# Altium PCB vending_machine_V1.0.PcbDoc
Units mil, origin at the board's own origin, x right, y up, seen from the top; angles counter-clockwise.
Board outline 2243.78 x 2899.78 mil, 2 copper layers (Top Layer, Bottom Layer); 12 components, 27 nets, 89 pads, 14 vias.
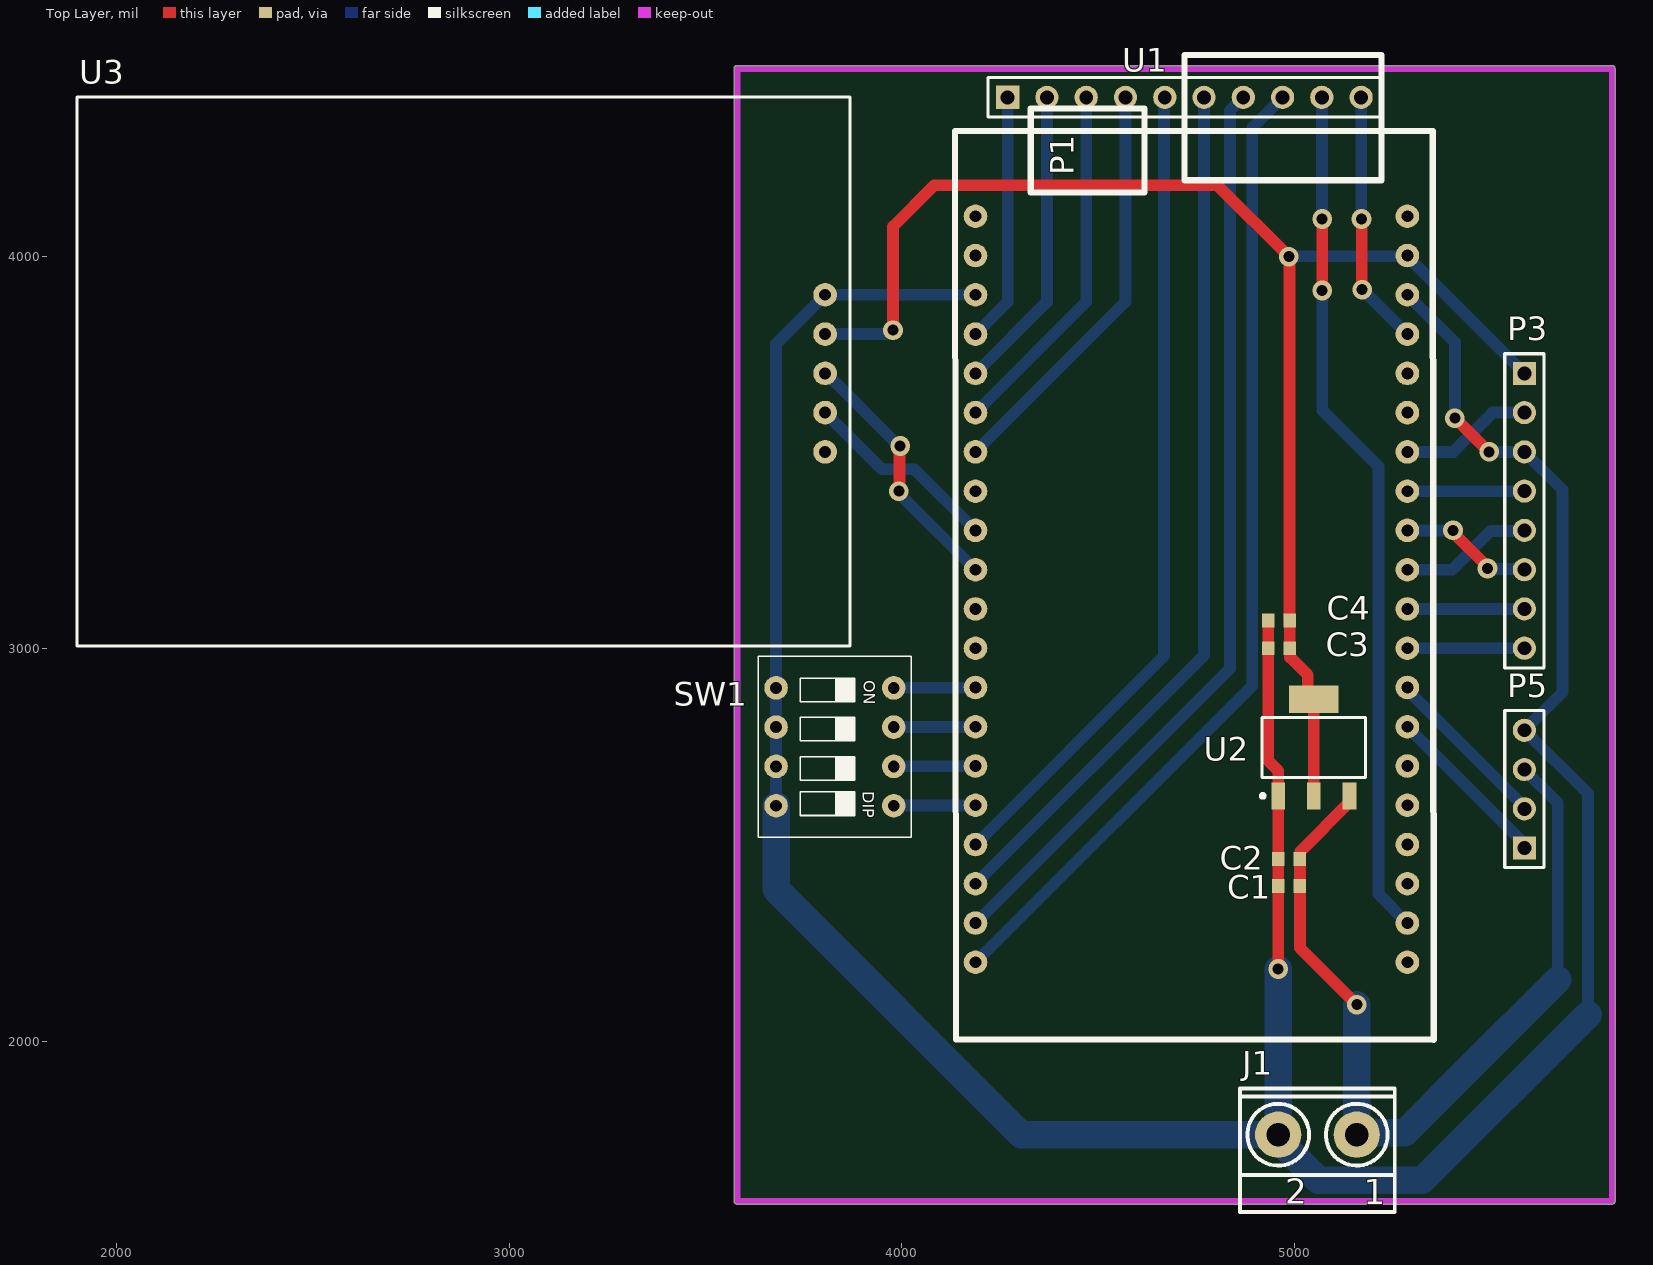
[diagram p0: Top Layer view]
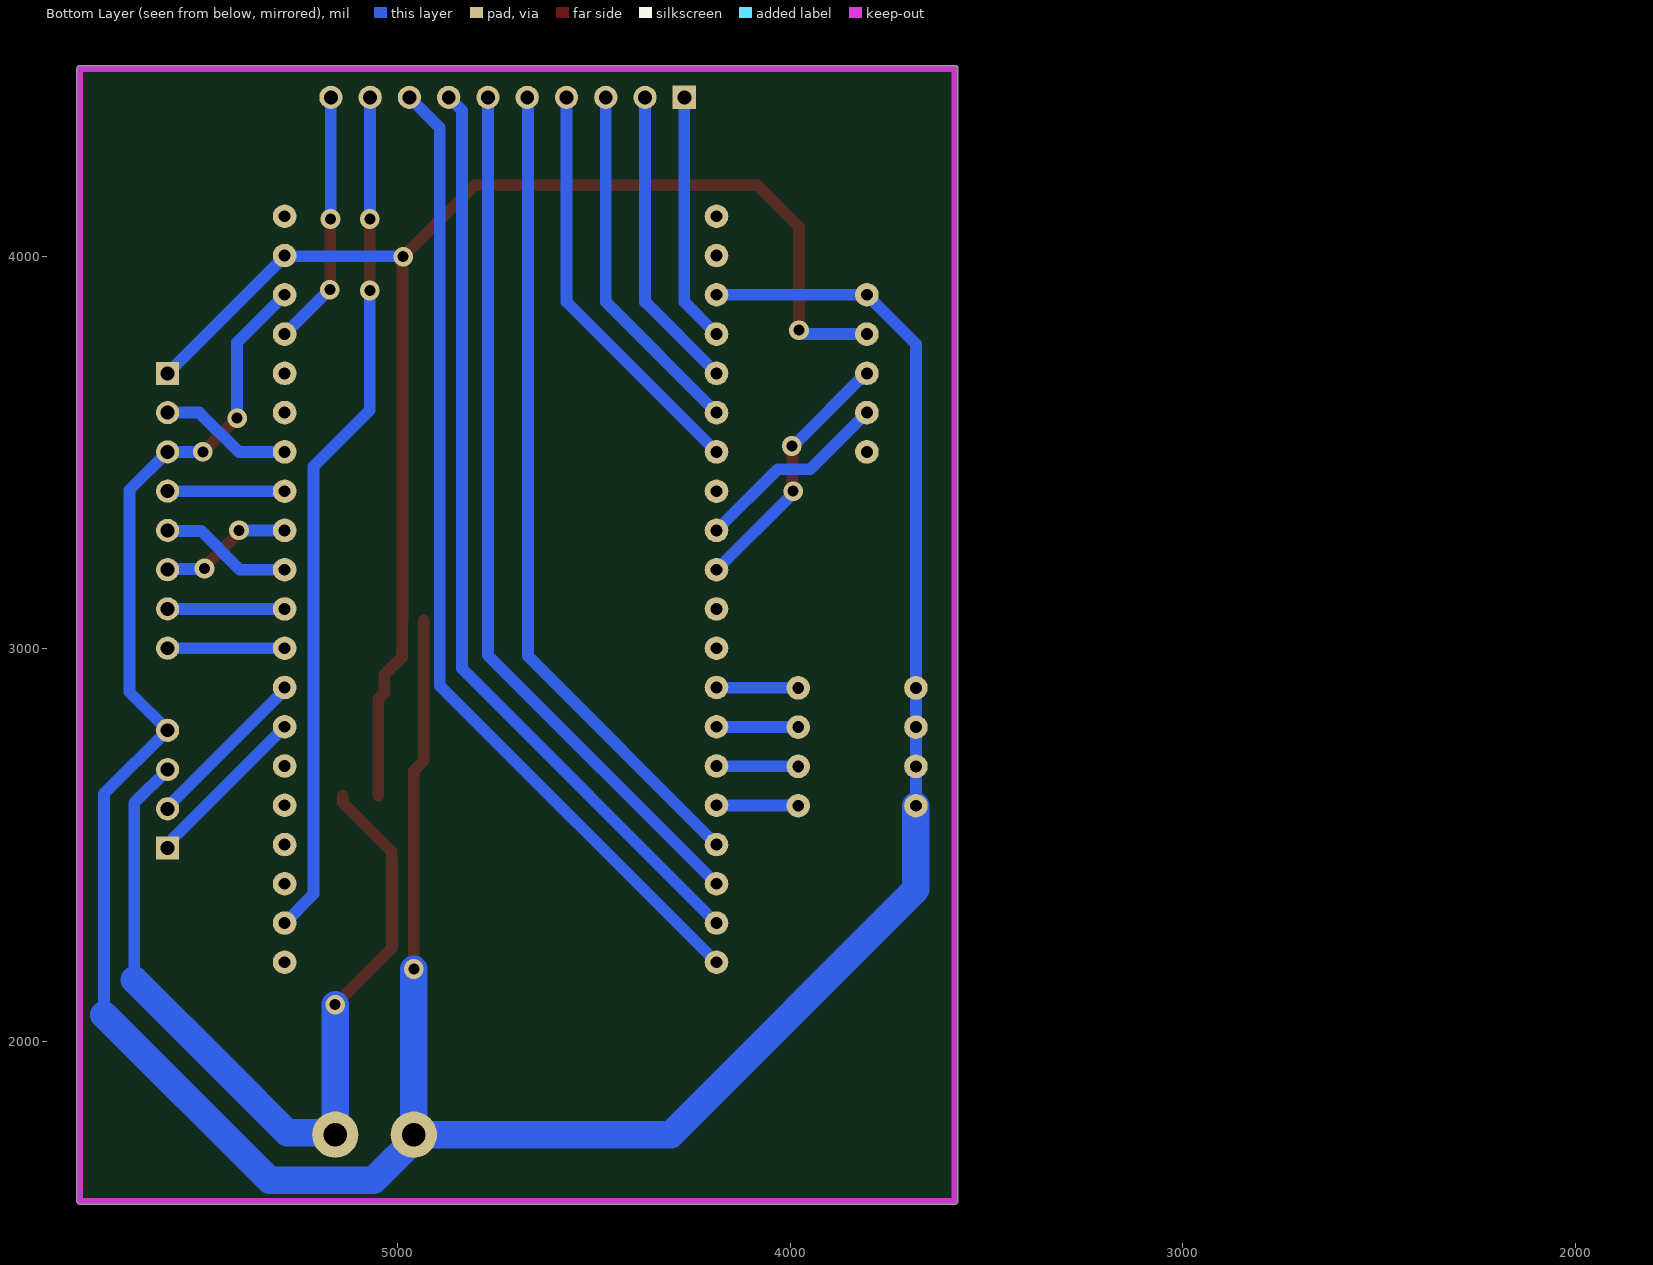
[diagram p1: Bottom Layer view, seen from below]

## Layer stack, top to bottom
Top Solder: solder mask 0.4, Solder Resist, Dk 3.5
Top Layer: signal copper 1.4
Dielectric 1: dielectric 12.6, FR-4, Dk 4.8
Bottom Layer: signal copper 1.4
Bottom Solder: solder mask 0.4, Solder Resist, Dk 3.5

## Board outline
3573.11,1594 3573.11,4478 cw(c3581,4478) 3581,4485.89 5809,4485.89 cw(c5809,4478) 5816.89,4478 5816.89,1594 cw(c5809,1594) 5809,1586.11 3581,1586.11 cw(c3581,1594)

## Design rules (kind name [scope] priority, off if disabled: settings)
Clearance [All] p1: gap=10 ignorepadtopadclearanceinfootprint=FALSE except(0: Arc-Hole Track-Hole SMDPad-Hole THPad-Hole Via-Hole Fill-Hole Poly-Hole Region-Hole Text-Hole)
ComponentClearance [All] p1 off: gap=10 collisioncheckmode=3 verticalgap=10 showdistances=FALSE
PolygonConnect [All] p1: connectstyle=Relief reliefconductorwidth=10 reliefentries=4 polygonreliefangle="90 Angle" airgapwidth=10
RoutingVias [All] p1: holewidth=28 width=50 viastyle="Through Hole" minholewidth=28 minwidth=50 maxholewidth=28 maxwidth=50
SolderMaskExpansion [All] p1: expansion=4 istentingtop=FALSE
Width [All] p1: maxlimit=70 minlimit=10 preferedwidth=30 toplayer_maxwidth=60 minimp=50.000000 maximp=50.000000 favimp=50.000000
29 further rules are at their usual default settings.

## Components (designator, comment, footprint, x,y, rotation, side; value= is the part's Value field where it differs from the comment)
C1 "Cap Semi" 1608[0603] 4986.56,2396 r0 top value=2.2uF
C2 "Cap Semi" 1608[0603] 4986.56,2465 r0 top value=0.1uF
C3 "Cap Semi" 1608[0603] 4961,3002 r0 top value=2.2uF
C4 "Cap Semi" 1608[0603] 4961,3073 r0 top value=0.1uF
J1 "Terminal_Block" "terminal block" 4978.5,2015.6 r270 top
P1 "Motor" HDR1X10 4270,4405 r0 top
P3 "RFID_SPI" HDR1X8 5586,3702 r270 top
P5 "Header 4" HDR1X4 5586,2493 r90 top
SW1 "DIP_4_Switch" Switch_4 3680,2901 r270 top
U1 "STM32F103" STM32F103 4188,2202 r0 top
U2 "LM1117" "LM1117 - duplicate" 5049.55,2749 r90 top
U3 "ESP12_F_Module" ESP12_F_Holtek 3867.99,3007.91 r90 top

## Footprints (in the part's own frame and the unit in brackets; to place one, negate y for a bottom-side part, rotate by r counter-clockwise, add the part's x,y. Pads: shape width x height; smd on the part's side, far side on the other; paste and mask are expansions set on the pad)
1608[0603] [mm] "Chip Capacitor, Body 1.6x0.8mm, IPC High Density"
  rect 0.8x0.9 smd: 1(-0.7,0) 2(0.7,0)
  body extent -0.87,-0.48 0.87,0.48, height 1.3
ESP12_F_Holtek [mil] "Holtek_Wi-Fi_module"
  round 60 hole 30: 1(494.09,62.99) 2(594.09,62.99) 3(694.09,62.99) 4(794.09,62.99) 5(894.09,62.99)
  silkscreen extent 0,0 1398,1969
HDR1X4 [mm] "Connector; Header; 4 Position"
  rect 1.5x1.5 hole 0.9: 1(0,0)
  round 1.5 hole 0.9: 2(2.54,0) 3(5.08,0) 4(7.62,0)
  silkscreen extent -1.27,-1.27 8.89,1.27
HDR1X8 [mm] "Connector; Header; 8 Position"
  rect 1.5x1.5 hole 0.9: 1(0,0)
  round 1.5 hole 0.9: 2(2.54,0) 3(5.08,0) 4(7.62,0) 5(10.16,0) 6(12.7,0) 7(15.24,0) 8(17.78,0)
  silkscreen extent -1.27,-1.27 19.05,1.27
HDR1X10 [mm] "Connector; Header; 10 Position"
  rect 1.5x1.5 hole 0.9: 1(0,0)
  round 1.5 hole 0.9: 2(2.54,0) 3(5.08,0) 4(7.62,0) 5(10.16,0) 6(12.7,0) 7(15.24,0) 8(17.78,0) 9(20.32,0) 10(22.86,0)
  silkscreen extent -1.27,-1.27 24.13,1.27
"LM1117 - duplicate" [mm] "SOT223, 4-Leads, Body 6.50x7.00mm (avg), Pitch 2.30mm, IPC Medium Density"
  rect 1.75x0.9 smd: 1(-3.125,2.3) 2(-3.125,0) 3(-3.125,-2.3)
  rect 1.75x3.2 smd: 4(3.125,0)
  silkscreen extent -3.25,-3.35 1.95,3.42, body extent -1.85,-3.35 1.85,3.35, height 1.8
STM32F103 [mil] "STM32F103"
  round 60 hole 30: 1(0,1900) 2(0,1800) 3(0,1700) 4(0,1600) 5(0,1500) 6(0,1400) 7(0,1300) 8(0,1200) 9(0,1100) 10(0,1000) 11(0,900) 12(0,800) 13(0,700) 14(0,600) 15(0,500) 16(0,400) 17(0,300) 18(0,200) 19(0,100) 20(0,0) 21(1100,1900) 22(1100,1800) 23(1100,1700) 24(1100,1600) 25(1100,1500) 26(1100,1400) 27(1100,1300) 28(1100,1200) 29(1100,1100) 30(1100,1000) 31(1100,900) 32(1100,800) 33(1100,700) 34(1100,600) 35(1100,500) 36(1100,400) 37(1100,300) 38(1100,200) 39(1100,100) 40(1100,0)
  silkscreen extent -52,-197 1167,2311
Switch_4 [mil] "DIP_4_Switch"
  round 60 hole 30: 1(0,300) 2(100,300) 3(200,300) 4(300,300) 5(0,0) 6(100,0) 7(200,0) 8(300,0)
  silkscreen extent -81,-45 381,345
"terminal block" [mm]
  round 3 hole 1.5 paste+0 mask+0.051: 1(6.416,4.585) 2(6.416,-0.495)
  silkscreen extent 3.42,-2.96 11.42,7.04

## Part data
C1 C2 C3 C4: "Capacitor (Semiconductor SIM Model)", LatestRevisionDate=29-May-2009, LatestRevisionNote="IPC-7351 Footprint Added.", PackageDescription="Chip Capacitor", PackageReference=C1206, Published=8-Jun-2000, Publisher="Altium Limited"
J1: library part "Terminal Block"
P1: library part "Header 10", "Header, 10-Pin", LatestRevisionDate=17-Jul-2002, LatestRevisionNote="Re-released for DXP Platform.", Publisher="Altium Limited"
P3: library part "Header 8", "Header, 8-Pin", LatestRevisionDate=17-Jul-2002, LatestRevisionNote="Re-released for DXP Platform.", Publisher="Altium Limited"
P5: "Header, 4-Pin", LatestRevisionDate=17-Jul-2002, LatestRevisionNote="Re-released for DXP Platform.", Publisher="Altium Limited"
SW1: library part Switch_4
U3: library part ESP12_F_Holtek

## Via types
v1: diameter 50, hole 28, Top Layer to Bottom Layer, 14 vias

## Nets (pads, with @x,y where several pads share a name; then routed paths per layer and width w, separated by ;. In a path a pad name is that pad's centre, name@x,y a point inside that pad or via, vN(x,y) a via of type N, cw(c..) or ccw(c..) an arc to the next point about the centre after c; other vN are vias at no path point)
3.3V: C3.2 C4.2 P3.1 U1.22 U2.2 U2.4 U3.4 | length 3691.6
  Top Layer w30: v1(3978,3812) 3978,4076 4083,4181 4804,4181 4987.81,3997.19 4987.81,3073.75 C4.2 C3.2 4989.31,3001.25 4989.31,2978.69 5034.09,2933.91 5034.09,2887.49 U2.4 U2.2
  Bottom Layer w30: U3.4 3962.59,3802 3972.59,3812 v1(3978,3812) ; v1(4986,3999) 4987.5,4000.5 5285.5,4000.5 U1.22@5286,4000 ; U1.22 5288,4000 P3.1
5V: C1.2 C2.2 J1.1 P5.3 U2.3 | length 2221
  Top Layer w30: U2.3 5140.1,2609.24 5014.87,2484 5014.87,2465.75 C2.2 C1.2 5014.12,2239.29 5159,2094.41 v1(5159,2094)
  Bottom Layer w30: P5.3 5671,2608 5671,2158
  Bottom Layer w70: v1(5159,2094) J1.1 5164.21,1768.21 5281.21,1768.21 5437,1924 5671,2158
GND: C1.1 C2.1 C3.1 C4.1 J1.2 P3.3 P5.4 SW1.5 SW1.6 SW1.7 SW1.8 U1.3 U1.23 U2.1 U3.5 | length 7989.8
  Top Layer w30: C4.1 4933.44,2715.56 4959,2690 U2.1 C2.1 C1.1 v1(4959,2185) ; v1(5409,3588) 5409.5,3588 5495.5,3502 v1(5496,3502)
  Bottom Layer w30: SW1.8 SW1.7 SW1.6 SW1.5 3680,3777 U3.5 U1.3 ; U1.23 5409,3781 v1(5409,3588) ; v1(5496,3502) P3.3 5683,3405 5683,2890 P5.4 5748,2631 5748,2069
  Bottom Layer w70: SW1.8 3680,2388 4305,1763 J1.2 v1(4959,2185) ; J1.2@4945.5,1763 5061.5,1647 5326,1647 5748,2069
Motor_0_PB12: P1.1 U1.4 | length 637
  Bottom Layer w30: U1.4 4270,3884 P1.1
Motor_1_PB13: P1.2 U1.5 | length 777.7
  Bottom Layer w30: U1.5 4370,3884 P1.2@4370,4404.31
Motor_2_PB14: P1.3 U1.6 | length 917.5
  Bottom Layer w30: U1.6 4470,3884 P1.3@4470,4402.7
Motor_3_PB15: P1.4 U1.7 | length 1057.7
  Bottom Layer w30: U1.7 4570,3884 P1.4@4570,4401.47
Motor_4_PB6: P1.5 U1.17 | length 2098.4
  Bottom Layer w30: U1.17 4668,2982 P1.5@4668,4401.6
Motor_5_PB7: P1.6 U1.18 | length 2244.1
  Bottom Layer w30: U1.18 4770,2984 P1.6
Motor_6_PB8: P1.7 U1.19 | length 2385.5
  Bottom Layer w30: U1.19 4836,2950 4836,4371 P1.7
Motor_7_PB9: P1.8 U1.20 | length 2526.9
  Bottom Layer w30: U1.20 4893,2907 4893,4328 P1.8
Motor_8_PC13: P1.9 U1.39 | length 2193.3
  Top Layer w30: v1(5071,3913) v1(5071,4095)
  Bottom Layer w30: P1.9 5070.5,4404.5 5070.5,4095.5 v1(5071,4095) ; v1(5071,3913) 5071,3608.04 5214.41,3464.63 5214.41,2375.59 U1.39
Motor_9_PB11: P1.10 U1.24 | length 653
  Top Layer w30: v1(5171,4095) 5171.86,4094.14 5171.86,3916.2 v1(5172.73,3915.34)
  Bottom Layer w30: P1.10 5170.5,4404.5 5170.5,4095.5 v1(5171,4095) ; v1(5172.73,3915.34) 5173.69,3915.34 5287.03,3802 U1.24
SPI_MISO_PA6: P3.5 U1.30 | length 339.4
  Bottom Layer w30: U1.30 5402,3202 5500.76,3300.76 5584.76,3300.76 P3.5
SPI_MOSI_PA7: P3.6 U1.29 | length 344.7
  Top Layer w30: v1(5404,3302) 5404,3297.5 5492,3209.5 v1(5492,3205)
  Bottom Layer w30: U1.29 v1(5404,3302) ; v1(5492,3205) 5493.5,3203.5 5584.5,3203.5 P3.6
SPI_RST_PB1: P3.2 U1.27 | length 339.4
  Bottom Layer w30: U1.27 5405,3502 5505,3602 P3.2
SPI_SCK_PA5: P3.7 U1.31 | length 298
  Bottom Layer w30: U1.31 P3.7
SPI_SDA_PA4: P3.8 U1.32 | length 299
  Bottom Layer w30: U1.32@5288,3003 U1.32 P3.8
SPI_SS_PB0: P3.4 U1.28 | length 298
  Bottom Layer w30: U1.28 P3.4
Switch_0_PA15: SW1.1 U1.13 | length 208.4
  Bottom Layer w30: SW1.1 3980.5,2901.5 4187.5,2901.5 U1.13
Switch_1_PB3: SW1.2 U1.14 | length 208.4
  Bottom Layer w30: SW1.2 3980.5,2801.5 4187.5,2801.5 U1.14
Switch_2_PB4: SW1.3 U1.15 | length 208.4
  Bottom Layer w30: SW1.3 3980.5,2701.5 4187.5,2701.5 U1.15
Switch_3_PB5: SW1.4 U1.16 | length 208.4
  Bottom Layer w30: SW1.4 3980.5,2601.5 4187.5,2601.5 U1.16
USART1_Rx_PA10: U1.10 U3.3 | length 664.6
  Top Layer w30: v1(3993,3402) 3994.5,3403.5 3994.5,3515.5 v1(3996,3517)
  Bottom Layer w30: U3.3 3808,3702 3993,3517 v1(3996,3517) ; v1(3993,3402) 3993,3397 U1.10
USART1_Tx_PA9: U1.9 U3.2 | length 507.1
  Bottom Layer w30: U3.2@3805.12,3601.88 3949,3458 4032,3458 U1.9
USART2_Rx_PA3: P5.2 U1.33 | length 432.4
  Bottom Layer w30: U1.33 5288,2896.5 5586,2598.5 P5.2
USART2_Tx_PA2: P5.1 U1.34 | length 432.4
  Bottom Layer w30: U1.34 5571.47,2518.53 5571.47,2507.53 P5.1
pads on no net: U1.1 U1.2 U1.8 U1.11 U1.12 U1.21 U1.25 U1.26 U1.35 U1.36 U1.37 U1.38 U1.40 U3.1

## Keep-outs
Keep-Out Layer:
  lines w15.75: 3581,1594 3581,4478 5809,4478 5809,1594 3581,1594

## Text inside footprints (layer, text, board x,y; h text height)
J1: Top Overlay "1" at 5176.7,1585.5 h62.99; Top Overlay "2" at 4977.1,1586.8 h62.99
SW1: Top Overlay "DIP" at 3901,2638 h30 r270; Top Overlay "ON" at 3904,2921 h30 r270